# Altium PCB hvSdbPCB.PcbDoc
Units mm, origin at the board's own origin, x right, y up, seen from the top; angles counter-clockwise.
Board outline 75 x 64.7 mm, 2 copper layers (Top Layer, Bottom Layer); 34 components, 29 nets, 103 pads, 16 vias.
Unrouted connection lines stored in the file: 1.
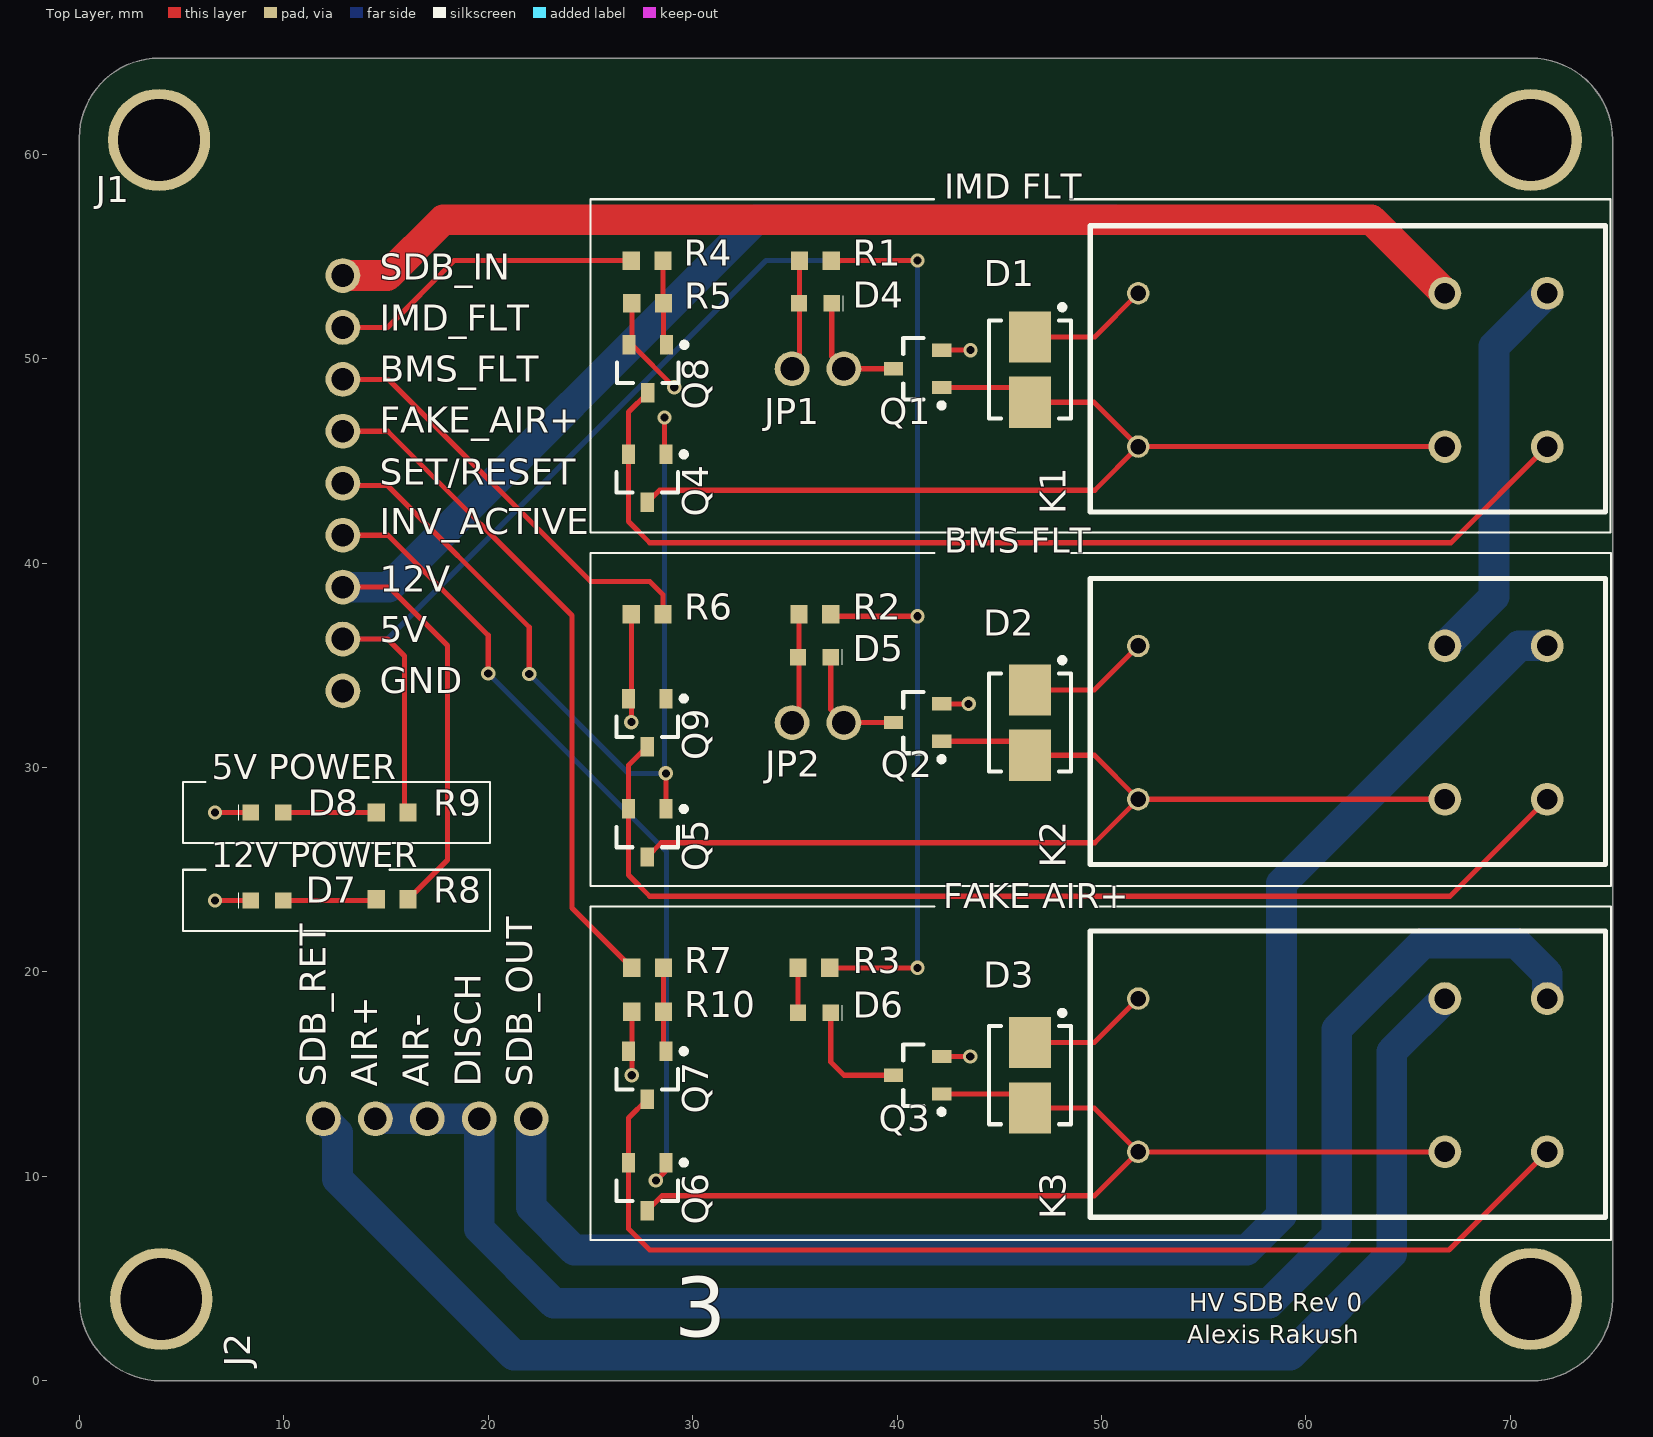
[diagram p0: Top Layer view]
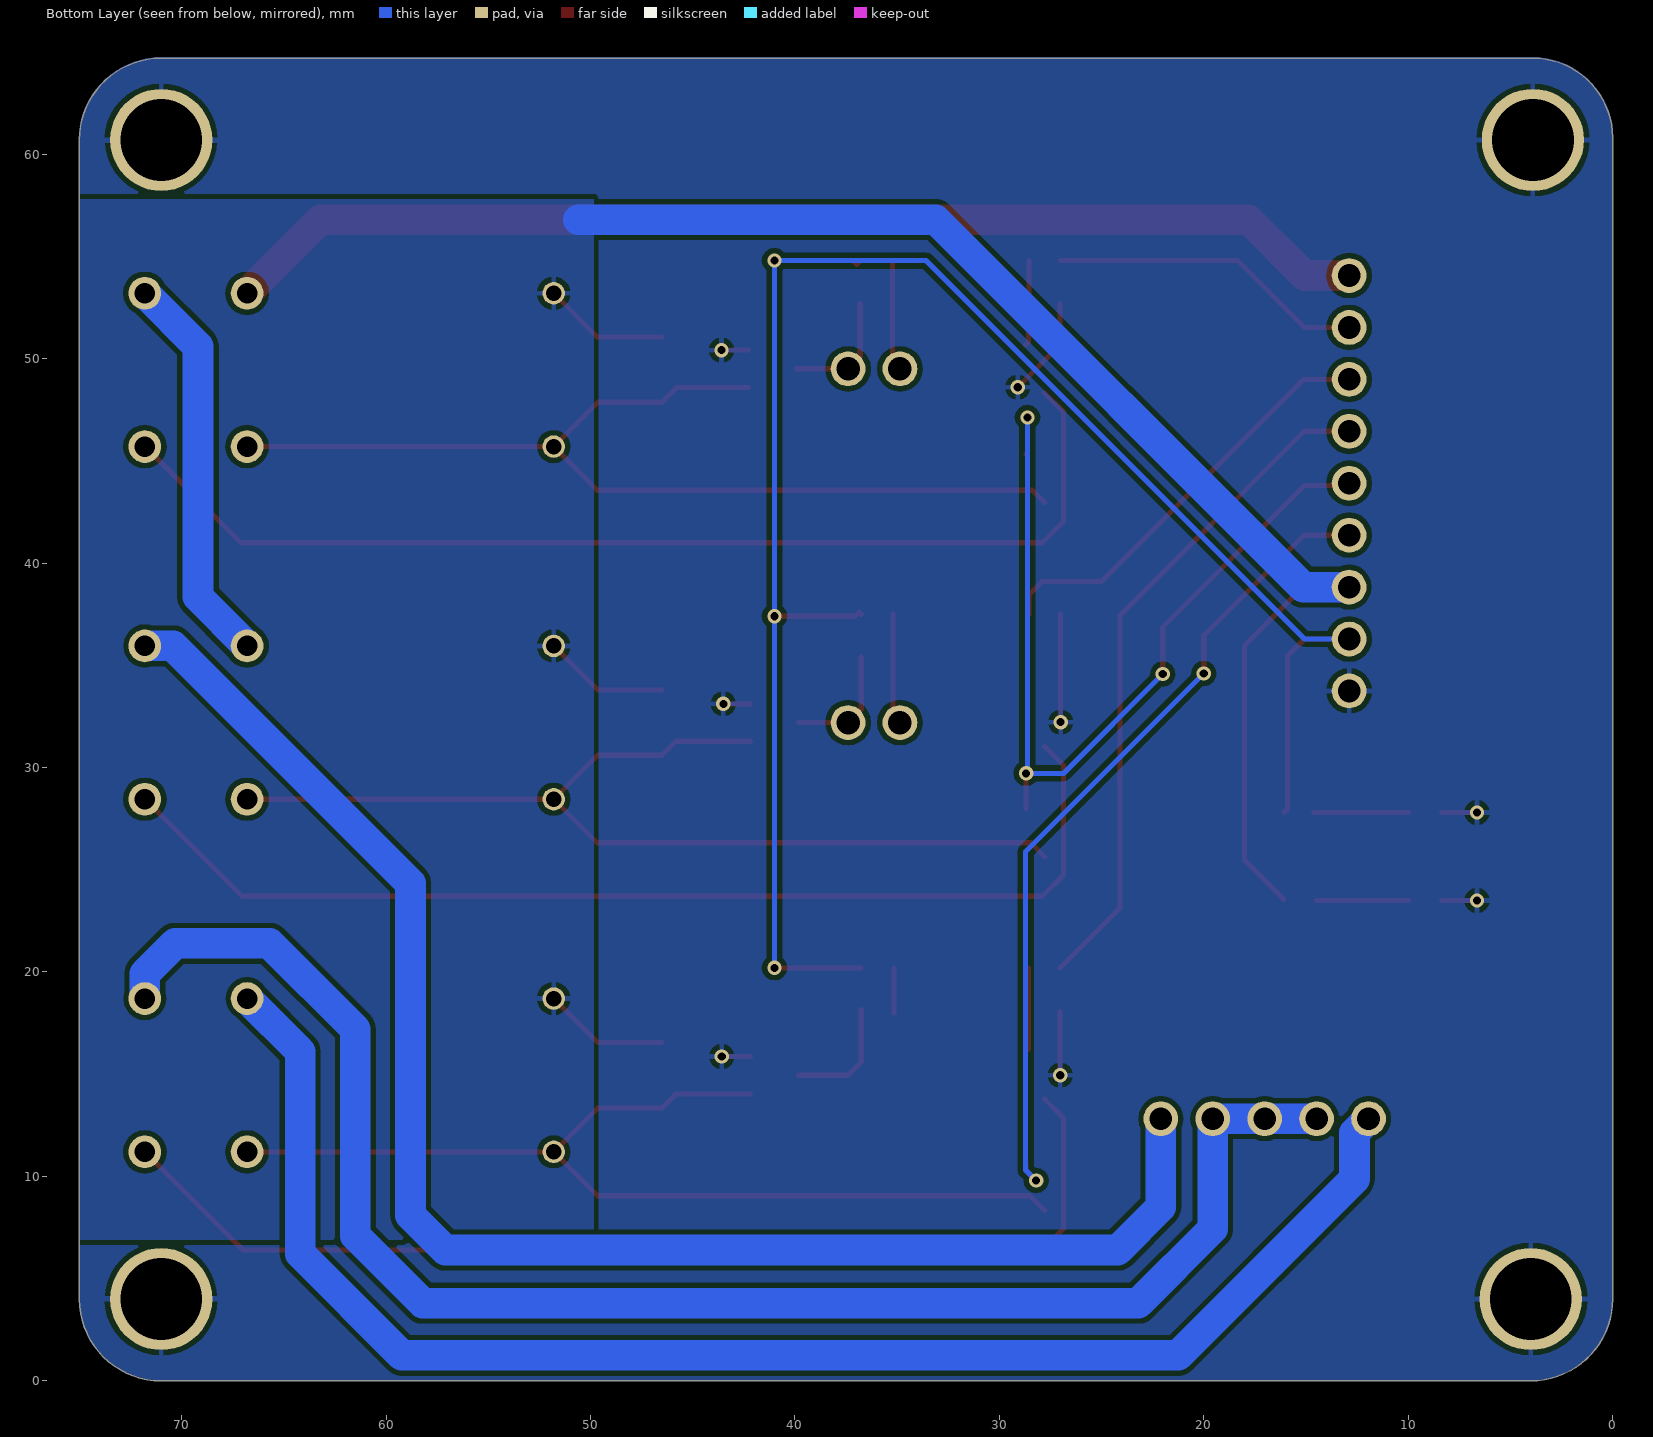
[diagram p1: Bottom Layer view, seen from below]

## Layer stack, top to bottom
Top Solder: solder mask 0.0102, Solder Resist, Dk 3.5
Top Layer: signal copper 0.0356
Dielectric 1: dielectric 0.32, FR-4, Dk 4.8
Bottom Layer: signal copper 0.0356
Bottom Solder: solder mask 0.0102, Solder Resist, Dk 3.5

## Board outline
71,0 ccw(c71,4) 75,4 75,60.7 ccw(c71,60.7) 71,64.7 3.9,64.7 ccw(c3.9,60.8) 0,60.8 0,4 ccw(c4,4) 4,0
cut-out: 12.573,119.888
cut-out: 165.608,30.607

## Design rules (kind name [scope] priority, off if disabled: settings)
Clearance [All] p1: gap=0.254 ignorepadtopadclearanceinfootprint=TRUE except(0: Arc-Hole Track-Hole SMDPad-Hole THPad-Hole Via-Hole Fill-Hole Poly-Hole Region-Hole Text-Hole)
PolygonConnect [All] p1: connectstyle=Relief reliefconductorwidth=0.254 reliefentries=4 polygonreliefangle="90 Angle" airgapwidth=0.254
RoutingVias [All] p1: holewidth=0.711 width=1.27 viastyle="Through Hole" minholewidth=0.711 minwidth=1.27 maxholewidth=0.711 maxwidth=1.27
SolderMaskExpansion [All] p1: expansion=0.102
Width [All] p1: maxlimit=5 minlimit=0.254 preferedwidth=0.254 minimp=50.000000 maximp=50.000000 favimp=50.000000
30 further rules are at their usual default settings.

## Components (designator, comment, footprint, x,y, rotation, side; value= is the part's Value field where it differs from the comment)
D1 "100V" DO-214AA 46.5,49.467 r270 top
D2 "100V" DO-214AA 46.5,32.2 r270 top
D3 "100V" DO-214AA 46.5,14.95 r270 top
D4 "Red" LED-0603 37.2,53.504 r180 top
D5 "Red" LED-0603 37.15,36.2 r180 top
D6 "Red" LED-0603 37.15,18.8 r180 top
D7 "Green" LED-0603 7.975,22.7 r0 top
D8 "Green" LED-0603 7.975,27 r0 top
J1 "23-0705530113-ND" 9PIN 12.889,54.067 r270 top
J2 "WM4903-ND" 5PIN 11.94,12.823 r0 top
JP1 "732-5315-ND" 2PIN-JP 37.4,49.504 r180 top
JP2 "732-5315-ND" 2PIN-JP 37.4,32.2 r180 top
K1 "5-1419124-6" "RELAY DPST SDC" 49.848,43 r0 top
K2 "5-1419124-6" "RELAY DPST SDC" 49.848,25.75 r0 top
K3 "5-1419124-6" "RELAY DPST SDC" 49.848,8.5 r0 top
Q1 "DMN6140L-13DICT-ND" SOT-23-3 41,49.504 r180 top
Q2 "DMN6140L-13DICT-ND" SOT-23-3 41,32.2 r180 top
Q3 "DMN6140L-13DICT-ND" SOT-23-3 41,14.95 r180 top
Q4 "DMN6140L-13DICT-ND" SOT-23-3 27.775,44.146 r270 top
Q5 "DMN6140L-13DICT-ND" SOT-23-3 27.775,26.8 r270 top
Q6 "DMN6140L-13DICT-ND" SOT-23-3 27.775,9.5 r270 top
Q7 "DMN6140L-13DICT-ND" SOT-23-3 27.775,14.95 r270 top
Q8 "DMN6140L-13DICT-ND" SOT-23-3 27.8,49.504 r270 top
Q9 "DMN6140L-13DICT-ND" SOT-23-3 27.775,32.2 r270 top
R1 "240R" RES-0603 36,54.8 r0 top
R2 "240R" RES-0603 35.975,37.496 r0 top
R3 "240R" RES-0603 35.925,20.2 r0 top
R4 "1K" RES-0603 27.775,54.8 r180 top
R5 "1K" RES-0603 27.8,52.704 r0 top
R6 "10K" RES-0603 27.775,37.496 r0 top
R7 "1K" RES-0603 27.8,20.2 r180 top
R8 "665R" RES-0603 15.3,23.55 r0 top
R9 "180R" RES-0603 15.3,27.8 r0 top
R10 "1K" RES-0603 27.8,18.05 r0 top

## Footprints (in the part's own frame and the unit in brackets; to place one, negate y for a bottom-side part, rotate by r counter-clockwise, add the part's x,y. Pads: shape width x height; smd on the part's side, far side on the other; paste and mask are expansions set on the pad)
2PIN-JP [mm]
  round 1.7 hole 1.15: 1(0,0) 2(2.54,0)
  body extent -1.24,-1.27 3.84,1.27, height 8.57
5PIN [mm]
  round 1.7 hole 1.11: 1(0,0) 2(2.54,0) 3(5.08,0) 4(7.62,0) 5(10.16,0)
  body extent -2.52,-12.82 12.72,0.77, height 7.06
9PIN [mm]
  round 1.7 hole 1.11: 1(0,0) 2(2.54,0) 3(5.08,0) 4(7.62,0) 5(10.16,0) 6(12.7,0) 7(15.24,0) 8(17.78,0) 9(20.32,0)
  body extent -2.5,-12.89 22.9,0.7, height 7.06
DO-214AA [mm] "Molded Diode, 2-Leads, Body 4.40x3.62mm, IPC Medium Density"
  rect 2.5x2.05 smd: 1(-1.6,0) 2(1.6,0)
  silkscreen extent -3.17,-2 2.4,2, body extent -2.6,-1.97 2.6,1.97, height 2.41
LED-0603 [mm]
  rect 0.8x0.8 smd: 1(2,0.8) 2(0.4,0.8)
  silkscreen extent -0.18,0.43 -0.18,1.17, body extent 0.4,0.4 2,1.2, height 0.7
"RELAY DPST SDC" [mm]
  round 1.1 hole 0.762: 1(1.95,2.7) 6(1.95,10.2)
  round 1.6 hole 1: 2(16.95,2.7) 3(21.95,2.7) 4(21.95,10.2) 5(16.95,10.2)
  silkscreen extent -0.4,-0.5 24.8,13.5, body extent 0,0 24.4,12.9, height 24.51
RES-0603 [mm] "Chip Resistor, 2-Leads, Body 1.60x0.80mm, IPC Medium Density"
  rect 0.85x0.9 smd: 1(-0.775,0) 2(0.775,0)
  body extent -0.85,-0.45 0.85,0.45, height 0.55
SOT-23-3 [mm] "SOT23, 3-Leads, Body 2.90x2.40mm, Pitch 0.92mm, IPC Medium Density"
  rect 0.95x0.65 smd: 1(-1.175,0.915) 2(1.175,0) 3(-1.175,-0.915)
  silkscreen extent -1.3,-1.5 0.7,1.91, body extent -1.25,-1.5 1.25,1.5, height 1.1

## Part data
D1 D2 D3: library part Diode-100V-3A, "DIODE GEN PURP 100V 3A DO214AA", Average Rectified Current=3A, Forward Voltage=1.15V, Manufacturer=MCC, Manufacturer Part Number=S3BB-TP, Max Surge Current=100A, Package Quantity=1, Peak Reverse Current=10uA, Supplier Part Number 1=S3BB-TPMSDKR-ND, ComponentLink1Description=http://www.mccsemi.com/up_pdf/S3AB-S3MB(SMB).PDF?src-supplier=Digi-Key, ComponentLink1URL=http://www.mccsemi.com/up_pdf/S3AB-S3MB(SMB).PDF?src-supplier=Digi-Key, ComponentLink2Description=https://www.verical.com/server-webapp/html/getDatasheet?partID=686538&src-supplier=Verical, ComponentLink2URL=https://www.verical.com/server-webapp/html/getDatasheet?partID=686538&src-supplier=Verical, ComponentLink3Description=http://www.mccsemi.com/up_pdf/S3AB-S3MB(SMB).PDF?src-supplier=Future+Electronics, ComponentLink3URL=http://www.mccsemi.com/up_pdf/S3AB-S3MB(SMB).PDF?src-supplier=Future+Electronics, Element Configuration=Single, Lead Free="Lead Free", Max Repetitive Reverse Voltage (Vrrm)=100V, Max Reverse Voltage (DC)=100V, Mount="Surface Mount", Number of Pins=2, Packaging="Tape and Reel", Peak Non-Repetitive Surge Current=100A, Pricing 1="1=0.46, 10=0.376, 25=0.344, 100=0.216, 250=0.2136, 500=0.2, 1000=0.136 (USD)", Radiation Hardening=No, Reverse Voltage=100V, Stock 1=9444, Supplier 1=Digi-Key
D4 D5 D6: library part LED-Red, "LED RED CLEAR 0603 SMD", Case/Package=0603, Case Code (Metric)=1608, Forward Current=30mA, Forward Voltage=2V, Manufacturer="Wurth Electronics", Manufacturer Part Number=150060RS75000, Max Operating Temperature=85°C, Min Operating Temperature=-40°C, Package Quantity=1, Supplier Part Number 1=732-4978-6-ND, Test Current=20mA, Case Code (Imperial)=0603, Color=Red, ComponentLink1Description=https://katalog.we-online.de/led/datasheet/150060RS75000.pdf?src-supplier=Digi-Key, ComponentLink1URL=https://katalog.we-online.de/led/datasheet/150060RS75000.pdf?src-supplier=Digi-Key, ComponentLink2Description=http://www.produktinfo.conrad.com/datenblaetter/750000-774999/759428-da-01-en-CHIPLED_0603_W_KL_ROT_150060RS75000.pdf?src-supplier=Conrad, ComponentLink2URL=http://www.produktinfo.conrad.com/datenblaetter/750000-774999/759428-da-01-en-CHIPLED_0603_W_KL_ROT_150060RS75000.pdf?src-supplier=Conrad, Dominant Wavelength=625nm, Height=0.7mm, Length=1.6mm, Lens Style=Clear,Rectangular, Luminous Intensity=250mcd, Mount="Surface Mount", Packaging="Cut Tape", Pricing 1="1=0.14, 50=0.133, 100=0.114, 500=0.099 (USD)", REACH SVHC=Unknown, Stock 1=18518, Supplier 1=Digi-Key, Viewing Angle=140°, Wavelength=625nm, Width=0.8mm
D7 D8: library part LED-Green, "LED GREEN CLEAR 0603 SMD", Case/Package=0603, Case Code (Metric)=1608, Forward Current=30mA, Forward Voltage=2V, Manufacturer="Wurth Electronics", Manufacturer Part Number=150060VS75000, Max Operating Temperature=85°C, Min Operating Temperature=-40°C, Package Quantity=1, Supplier Part Number 1=732-4980-1-ND, Test Current=20mA, Case Code (Imperial)=0603, Color=Green, ComponentLink1Description=https://katalog.we-online.de/led/datasheet/150060VS75000.pdf?src-supplier=Digi-Key, ComponentLink1URL=https://katalog.we-online.de/led/datasheet/150060VS75000.pdf?src-supplier=Digi-Key, Dominant Wavelength=570nm, Height=0.7mm, Length=1.6mm, Lens Style=Clear,Rectangular, Luminous Intensity=40mcd, Mount="Surface Mount", Number of Pins=2, Packaging="Tape and Reel", Pricing 1="1=0.14, 50=0.133, 100=0.114, 500=0.099 (USD)", REACH SVHC=Unknown, Stock 1=118118, Supplier 1=Digi-Key, Viewing Angle=140°, Wavelength=570nm, Width=0.8mm
J1: library part 9PIN, "CONN HEADER R/A 9POS 2.54MM", Color=Black, Contact Resistance=30mR, Current Rating=3A, Flammability Rating="UL94 V-0", Insulation Resistance=1GR, Manufacturer=Molex, Manufacturer Part Number=70553-0112, Max Operating Temperature=105°C, Min Operating Temperature=-40°C, Package Quantity=1, Voltage Rating=250V, ComponentLink1Description=https://www.molex.com/pdm_docs/ps/PS-70400.pdf?src-supplier=Digi-Key, ComponentLink1URL=https://www.molex.com/pdm_docs/ps/PS-70400.pdf?src-supplier=Digi-Key, ComponentLink2Description=http://www.mouser.com/ds/2/276/0705530112_PCB_HEADERS-172840.pdf?src-supplier=Mouser, ComponentLink2URL=http://www.mouser.com/ds/2/276/0705530112_PCB_HEADERS-172840.pdf?src-supplier=Mouser, Connector Type="Male Pin", Contact Material=Bronze, Contact Mating Length=0.24inch, Contact Plating=Gold, ELV=Compliant, Glow Wire Compliant=Non-compliant, Housing Material=Thermoplastic, Material=Brass, Mount="Through Hole", Number of Circuits=8, Number of Contacts=8, Number of Positions=8, Number of Rows=1, Orientation="Right Angle", Packaging=Rail/Tube, Pitch=2.54mm, Supplier 1=Digi-Key, Supplier Part Number 1=23-0705530113-ND, Termination=Solder, Voltage Rating (DC)=250V
J2: library part 5PIN, "CONN HEADER R/A 5POS 2.54MM", Color=Black, Contact Resistance=30mR, Manufacturer=Molex, Manufacturer Part Number=0705530004, Max Operating Temperature=105°C, Min Operating Temperature=-40°C, ComponentLink1Description=https://www.molex.com/pdm_docs/ps/PS-70400.pdf?src-supplier=Digi-Key, ComponentLink1URL=https://www.molex.com/pdm_docs/ps/PS-70400.pdf?src-supplier=Digi-Key, ComponentLink2Description=http://components.arrow.com/part/dataview/2934370S3514244N3303?src-supplier=Arrow, ComponentLink2URL=http://components.arrow.com/part/dataview/2934370S3514244N3303?src-supplier=Arrow, Connector Type="Male Pin", Contact Material=Bronze, Contact Mating Length=0.24inch, Contact Plating=Gold, Depth=13.59mm, Fastening Type=Latch, Housing Color=Black, Housing Material=Polyester, Length=15.25mm, Mount="Through Hole", Number of Contacts=5, Number of Positions=5, Number of Rows=1, Orientation="Right Angle", Packaging=Rail/Tube, Pitch=2.54mm, Pricing 1="1=1.39, 10=1.22, 100=1.0527, 500=0.86134, 1000=0.76563, 5000=0.66993, 10000=0.63643 (USD)", Stock 1=2739, Supplier 1=Digi-Key, Supplier Part Number 1=WM4903-ND, Termination=Solder
JP1 JP2: library part 2PIN-TEST, "CONN HEADER VERT 2POS 2.54MM"
K1 K2 K3: "General Purpose Relay, Osa Series, Power, Non Latching, Dpst-No, 12 Vdc, 3 A Rohs Compliant: Yes", Coil Current=45mA, Coil Power=600mW, Coil Resistance=270R, Coil Voltage (DC)=12V, Contact Current Rating=3A, Contact Voltage Rating (AC)=240V, Manufacturer="TE Connectivity", Max Operating Temperature=60°C, Min Operating Temperature=-30°C, Package Quantity=1000, Supplier Part Number 1=OSA-SS-212DM3,000-ND, Category=Relays, Coil Type=Non-Latching, ComponentLink1Description=http://www.farnell.com/datasheets/1652820.pdf?src-supplier=Farnell, ComponentLink1URL=http://www.farnell.com/datasheets/1652820.pdf?src-supplier=Farnell, ComponentLink2Description=http://www.farnell.com/cad/1652820.pdf?src-supplier=Element14, ComponentLink2URL=http://www.farnell.com/cad/1652820.pdf?src-supplier=Element14, ComponentLink3Description=http://www.te.com/commerce/DocumentDelivery/DDEController?Action=srchrtrv&DocNm=5-1419124-6&DocType=Customer+Drawing&DocLang=English&src-supplier=Digi-Key, ComponentLink3URL=http://www.te.com/commerce/DocumentDelivery/DDEController?Action=srchrtrv&DocNm=5-1419124-6&DocType=Customer+Drawing&DocLang=English&src-supplier=Digi-Key, Contact Material=Silver, ELV=Compliant, Height=0.976inch, Length=24.4mm, Manufacturer Part Number=5-1419124-6, Mount="Through Hole", Operate Time=20ms, Packaging=Box, Pricing 1="1=2.54, 10=2.385, 25=2.1204, 50=2.0142, 100=1.9083, 250=1.69624, 500=1.59022, 1000=1.48421, 5000=1.4312 (USD)", REACH SVHC=Unknown, Relay Type="General Purpose", Release Time=10ms, Stock 1=2593, Supplier 1=Digi-Key, Termination=PCB, Throw Configuration=DPST, Weight=13g, Width=12.9mm
Q1 Q2 Q3 Q4 Q5 Q6 Q7 Q8 Q9: library part N-FET-60V-1.6A, "MOSFET N-CH 60V 1.6A SOT23", Case/Package=TO-236-3, Continuous Drain Current (ID)=1.6A, Drain to Source Voltage (Vdss)=60V, Input Capacitance=315pF, Manufacturer=Diodes, Manufacturer Part Number=DMN6140L-13, Max Operating Temperature=150°C, Max Power Dissipation=700mW, Min Operating Temperature=-55°C, Package Quantity=10000, Supplier Part Number 1=DMN6140L-13DIDKR-ND, ComponentLink1Description=https://www.diodes.com/assets/Datasheets/DMN6140L.pdf?src-supplier=Digi-Key, ComponentLink1URL=https://www.diodes.com/assets/Datasheets/DMN6140L.pdf?src-supplier=Digi-Key, Mount="Surface Mount", Packaging="Cut Tape", Pricing 1="1=0.34, 10=0.256, 25=0.224, 100=0.1217, 250=0.12104, 500=0.09926, 1000=0.07365, 2500=0.06468, 5000=0.05924 (USD)", Rds On Max=140mR, Stock 1=274948, Supplier 1=Digi-Key
R1 R2 R3: library part 0603-240R, "RES 240 OHM 1% 1/10W 0603", Case/Package=0603, Case Code (Metric)=1608, Manufacturer="Stackpole Electronics", Manufacturer Part Number=RMCF0603FT240R, Max Operating Temperature=155°C, Max Power Dissipation=100mW, Min Operating Temperature=-55°C, Package Quantity=5000, Supplier Part Number 1=738-RMCF0603FT240RDKR-ND, Temperature Coefficient=100ppm/°C, Tolerance=1%, Case Code (Imperial)=0603, ComponentLink1Description=https://www.seielect.com/catalog/SEI-RMCF_RMCP.pdf?src-supplier=Avnet, ComponentLink1URL=https://www.seielect.com/catalog/SEI-RMCF_RMCP.pdf?src-supplier=Avnet, ComponentLink2Description=http://components.arrow.com/part/dataview/40960290S7280662N1174?src-supplier=Arrow, ComponentLink2URL=http://components.arrow.com/part/dataview/40960290S7280662N1174?src-supplier=Arrow, ComponentLink3Description=https://www.seielect.com/catalog/SEI-Packaging.pdf?src-supplier=Digi-Key, ComponentLink3URL=https://www.seielect.com/catalog/SEI-Packaging.pdf?src-supplier=Digi-Key, ComponentLink4Description=https://www.seielect.com/Catalog/SEI-RMCF_RMCP.pdf?src-supplier=Digi-Key, ComponentLink4URL=https://www.seielect.com/Catalog/SEI-RMCF_RMCP.pdf?src-supplier=Digi-Key, ComponentLink5Description=http://www.seielect.com/Catalog/SEI-RMC.pdf?src-supplier=Future+Electronics, ComponentLink5URL=http://www.seielect.com/Catalog/SEI-RMC.pdf?src-supplier=Future+Electronics, Composition="Thick Film", Contact Plating=Tin,Matte, Features="Automotive AEC-Q200", Height=0.022inch, Lead Free="Lead Free", Length=0.061inch, Mount="Surface Mount", Number of Terminations=2, Packaging="Tape and Reel", Power Rating=100mW, Pricing 1="1=0.1, 10=0.016, 100=0.0065, 1000=0.00292, 2500=0.00253 (USD)", Radiation Hardening=No, Resistance=240R, Stock 1=23096, Supplier 1=Digi-Key, Width=0.031inch
R4 R5 R7 R10: library part 0603-1KR, "RES SMD 1K OHM 1% 1/10W 0603", Case/Package=0603, Case Code (Metric)=1608, Manufacturer="Vishay Dale", Manufacturer Part Number=CRCW06031K00FKEA, Max Operating Temperature=155°C, Max Power Dissipation=100mW, Min Operating Temperature=-55°C, Package Quantity=10, Resistance=1kR, Supplier Part Number 1=541-1.00KHCT-ND, Temperature Coefficient=100ppm/°C, Tolerance=1%, Voltage Rating=75V, Case Code (Imperial)=0603, ComponentLink1Description=http://www.vishay.com/docs/20035/dcrcwe3.pdf?src-supplier=Digi-Key, ComponentLink1URL=http://www.vishay.com/docs/20035/dcrcwe3.pdf?src-supplier=Digi-Key, ComponentLink2Description=http://uk.rs-online.com/webdocs/0d98/0900766b80d98afc.pdf?src-supplier=RSComponents, ComponentLink2URL=http://uk.rs-online.com/webdocs/0d98/0900766b80d98afc.pdf?src-supplier=RSComponents, ComponentLink3Description=http://www.vishay.com/docs/20035/dcrcwe3.pdf?src-supplier=Avnet, ComponentLink3URL=http://www.vishay.com/docs/20035/dcrcwe3.pdf?src-supplier=Avnet, ComponentLink4Description=http://www.vishay.com/docs/20035/dcrcwe3.pdf?src-supplier=Avnet+Asia, ComponentLink4URL=http://www.vishay.com/docs/20035/dcrcwe3.pdf?src-supplier=Avnet+Asia, ComponentLink5Description=http://www.farnell.com/datasheets/2310790.pdf?src-supplier=Element14, ComponentLink5URL=http://www.farnell.com/datasheets/2310790.pdf?src-supplier=Element14, ComponentLink6Description=https://www.distrelec.biz/Web/Downloads/a_/en/flD-CRCW-e3_data_en.pdf?mime=application%2Fpdf&src-supplier=Distrelec, ComponentLink6URL=https://www.distrelec.biz/Web/Downloads/a_/en/flD-CRCW-e3_data_en.pdf?mime=application%2Fpdf&src-supplier=Distrelec, ComponentLink7Description=http://www.vishay.com/docs/20035/dcrcwe3.pdf?src-supplier=Future+Electronics, ComponentLink7URL=http://www.vishay.com/docs/20035/dcrcwe3.pdf?src-supplier=Future+Electronics, ComponentLink8Description=http://www.vishay.com/docs/20035/dcrcwe3.pdf?src-supplier=Avnet+Europe, ComponentLink8URL=http://www.vishay.com/docs/20035/dcrcwe3.pdf?src-supplier=Avnet+Europe, Composition="Thick Film", Contact Plating=Tin, Depth=0.85mm, Features="Automotive AEC-Q200", Height=0.45mm, Lead Free="Lead Free", Length=1.55mm, Military Standard=Not, Mount="Surface Mount", Number of Pins=2, Number of Terminations=2, Packaging="Tape and Reel", Power Rating=100mW, Pricing 1="1=0.1, 10=0.034, 100=0.0139, 1000=0.00623, 2500=0.0054 (USD)", Radiation Hardening=No, REACH SVHC=Unknown, Stock 1=671453, Supplier 1=Digi-Key, Termination=SMD/SMT, Voltage Rating (DC)=75V, Weight=7.1E-05oz, Width=0.033inch
R6: library part 0603-10KR, "RES SMD 10K OHM 5% 1/10W 0603", Case/Package=0603, Case Code (Metric)=1608, Manufacturer=Yageo, Manufacturer Part Number=RC0603JR-0710KL, Max Operating Temperature=155°C, Max Power Dissipation=100mW, Min Operating Temperature=-55°C, Resistance=10kR, Supplier Part Number 1=311-10KGRDKR-ND, Temperature Coefficient=100ppm/°C, Tolerance=5%, Voltage Rating=50V, Case Code (Imperial)=0603, ComponentLink1Description=http://www.yageo.com/documents/recent/PYu-RC_Group_51_RoHS_L_10.pdf?src-supplier=Digi-Key, ComponentLink1URL=http://www.yageo.com/documents/recent/PYu-RC_Group_51_RoHS_L_10.pdf?src-supplier=Digi-Key, Composition="Thick Film", Contact Plating=Tin,Matte, Depth=0.8mm, Features="Moisture Resistant", Height - Seated (Max)=0.022inch, Lead Free="Lead Free", Length=0.063inch, Military Standard=Not, Number of Pins=2, Number of Terminations=2, Packaging="Tape and Reel", Power Rating=100mW, Pricing 1="1=0.1, 10=0.019, 100=0.0077, 1000=0.00347, 2500=0.00301 (USD)", Radiation Hardening=No, REACH SVHC=Unknown, Stock 1=3006558, Supplier 1=Digi-Key, Termination=SMD/SMT, Voltage Rating (DC)=50V, Width=0.031inch
R8: library part 0603-665R, "RES SMD 665 OHM 1% 1/10W 0603", Case/Package=0603, Case Code (Metric)=1608, Manufacturer=Yageo, Manufacturer Part Number=RC0603FR-07665RL, Max Operating Temperature=155°C, Max Power Dissipation=100mW, Min Operating Temperature=-55°C, Package Quantity=1, Supplier Part Number 1=311-665HRDKR-ND, Temperature Coefficient=100ppm/°C, Tolerance=1%, Voltage Rating=75V, Voltage Rating (DC)=50V, Case Code (Imperial)=0603, ComponentLink1Description=http://www.yageo.com/documents/recent/PYu-RC_Group_51_RoHS_L_9.pdf?src-supplier=Digi-Key, ComponentLink1URL=http://www.yageo.com/documents/recent/PYu-RC_Group_51_RoHS_L_9.pdf?src-supplier=Digi-Key, ComponentLink2Description=http://www.yageo.com/documents/recent/PYu-RC0603_51_RoHS_L_4.pdf?src-supplier=Avnet, ComponentLink2URL=http://www.yageo.com/documents/recent/PYu-RC0603_51_RoHS_L_4.pdf?src-supplier=Avnet, ComponentLink3Description=http://www.yageo.com/documents/recent/PYu-RC_Group_51_RoHS_L_10.pdf?src-supplier=Digi-Key, ComponentLink3URL=http://www.yageo.com/documents/recent/PYu-RC_Group_51_RoHS_L_10.pdf?src-supplier=Digi-Key, ComponentLink4Description=http://www.yageo.com/documents/recent/PYu-RC0603_51_RoHS_L_4.pdf?src-supplier=Avnet+Europe, ComponentLink4URL=http://www.yageo.com/documents/recent/PYu-RC0603_51_RoHS_L_4.pdf?src-supplier=Avnet+Europe, Composition="Thick Film", Contact Plating=Tin,Matte, Depth=0.8mm, Features="Moisture Resistant", Height=0.022inch, Lead Free="Lead Free", Length=1.6mm, Military Standard=Not, Number of Terminations=2, Packaging="Tape and Reel", Power Rating=100mW, Pricing 1="1=0.1, 10=0.023, 100=0.0094, 1000=0.00421, 2500=0.00366 (USD)", Resistance=665R, Stock 1=143871, Supplier 1=Digi-Key, Termination=SMD/SMT, Weight=7.1E-05oz, Width=0.8mm
R9: library part 0603-180R, "RES SMD 180 OHM 1% 1/10W 0603", Case/Package=0603, Case Code (Metric)=1608, Manufacturer="TE Connectivity", Manufacturer Part Number=CRGCQ0603F180R, Max Operating Temperature=155°C, Max Power Dissipation=100mW, Min Operating Temperature=-55°C, Supplier Part Number 1=A129679DKR-ND, Temperature Coefficient=100ppm/°C, Tolerance=1%, Case Code (Imperial)=0603, ComponentLink1Description=https://www.te.com/commerce/DocumentDelivery/DDEController?Action=srchrtrv&DocNm=1773204-3&DocType=DS&DocLang=English&src-supplier=Digi-Key, ComponentLink1URL=https://www.te.com/commerce/DocumentDelivery/DDEController?Action=srchrtrv&DocNm=1773204-3&DocType=DS&DocLang=English&src-supplier=Digi-Key, ComponentLink2Description=https://www.te.com/commerce/DocumentDelivery/DDEController?Action=srchrtrv&amp;DocNm=1773204-3&amp;DocType=DS&amp;DocLang=English&src-supplier=Digi-Key, ComponentLink2URL=https://www.te.com/commerce/DocumentDelivery/DDEController?Action=srchrtrv&amp;DocNm=1773204-3&amp;DocType=DS&amp;DocLang=English&src-supplier=Digi-Key, ComponentLink3Description=http://www.te.com/commerce/DocumentDelivery/DDEController?Action=srchrtrv&DocNm=1773204-3&DocType=DS&DocLang=English&src-supplier=Digi-Key, ComponentLink3URL=http://www.te.com/commerce/DocumentDelivery/DDEController?Action=srchrtrv&DocNm=1773204-3&DocType=DS&DocLang=English&src-supplier=Digi-Key, ComponentLink4Description=http://www.farnell.com/datasheets/2609223.pdf?src-supplier=Farnell, ComponentLink4URL=http://www.farnell.com/datasheets/2609223.pdf?src-supplier=Farnell, Composition="Thick Film", Features="Moisture Resistant,Automotive AEC-Q200", Number of Terminations=2, Packaging="Tape and Reel", Pricing 1="1=0.1, 10=0.03, 100=0.012, 1000=0.00541, 2500=0.00469 (USD)", Resistance=180R, Stock 1=17329, Supplier 1=Digi-Key

## Free pads (board coordinates)
  round 5 hole 4 unplated: 0(3.9,60.7) 0(4,4) 0(71,4) 0(71,60.7)

## Via types
v1: diameter 0.7, hole 0.4, Top Layer to Bottom Layer, 16 vias

## Nets (pads, with @x,y where several pads share a name; then routed paths per layer and width w, separated by ;. In a path a pad name is that pad's centre, name@x,y a point inside that pad or via, vN(x,y) a via of type N, cw(c..) or ccw(c..) an arc to the next point about the centre after c; other vN are vias at no path point)
5V: J1.8 R1.2 R2.2 R3.2 R9.2 | length 94.5
  Top Layer w0.254: J1.8 15.067,36.287 15.9,35.454 15.9,27.975 R9.2 ; R2.2 36.854,37.6 37.054,37.4 v1(41,37.4) ; R3.2@36.775,20.2 v1(41,20.2) ; R1.2 36.975,54.6 37.175,54.8 v1(41,54.8)
  Bottom Layer w0.254: J1.8 15.067,36.287 33.58,54.8 v1(41,54.8) v1(41,37.4) v1(41,20.2)
12V: D1.1 D2.1 D3.1 J1.7 K1.6 K2.6 K3.6 R8.2 | length 83.2
  Top Layer w0.254: J1.7 15.14,38.827 18,35.967 18,25.475 R8.2 ; D3.1 49.648,16.55 K3.6 ; D2.1 49.648,33.8 K2.6 ; D1.1 49.665,51.067 K1.6
  Bottom Layer w1.5: J1.7 15.14,38.827 33.113,56.8 50.6,56.8
AIRs: J2.2 J2.3 J2.4 K3.4 | length 79.2
  Bottom Layer w1.5: J2.2 J2.3 J2.4 19.56,7.44 23.2,3.8 58.2,3.8 61.5,7.1 61.5,17.197 65.703,21.4 70.318,21.4 71.798,19.921 K3.4
BMS_FLT: J1.3 Q9.1 R6.2 | length 21
  Top Layer w0.254: J1.3 15.127,48.987 25.014,39.1 27.9,39.1 28.55,38.45 R6.2
FAKE_AIR+: J1.4 R7.2 | length 33.4
  Top Layer w0.254: J1.4 15.085,46.447 24.1,37.432 24.1,23.125 R7.2
GND: D7.2 D8.2 J1.9 pad.0 Q1.3 Q2.3 Q3.3 Q7.3 Q8.3 Q9.3 R5.1 R6.1 R10.1 | length 20.9
  Top Layer w0.254: v1(6.635,23.5) D7.2 ; v1(6.635,27.8) D8.2 ; v1(27,32.221) R6.1 ; v1(27.021,14.95) 27.025,14.954 R10.1 ; R5.1 27.025,50.679 v1(29.1,48.604) ; Q3.3 v1(43.575,15.865) ; Q2.3 v1(43.5,33.115) ; Q1.3@42.267,50.419 v1(43.592,50.419)
IMD_FLT: J1.2 R4.2 | length 15.5
  Top Layer w0.254: J1.2 15.067,51.527 18.34,54.8 R4.2
INV_ACTIVE: J1.6 Q6.1 | length 40.7
  Top Layer w0.254: J1.6 15.1,41.367 20,36.467 v1(20,34.6) ; v1(28.2,9.8) 28.69,10.29 Q6.1
  Bottom Layer w0.254: v1(20,34.6) 28.715,25.885 28.715,10.315 v1(28.2,9.8)
NetD1_2: D1.2 K1.1 K1.2 Q1.1 Q4.2 | length 50.9
  Top Layer w0.254: Q4.2 28.371,43.567 49.665,43.567 K1.1 ; Q1.1@42.267,48.589 45.778,48.589 D1.2 49.631,47.867 K1.1 ; K1.2 K1.1
NetD2_2: D2.2 K2.1 K2.2 Q2.1 Q5.2 | length 51
  Top Layer w0.254: Q5.2 28.467,26.317 49.665,26.317 K2.1 ; Q2.1 45.815,31.285 D2.2 49.648,30.6 K2.1 ; K2.2 K2.1
NetD3_2: D3.2 K3.1 K3.2 Q3.1 Q6.2 | length 51
  Top Layer w0.254: Q6.2 28.5,9.05 49.648,9.05 K3.1 ; Q3.1 45.815,14.035 D3.2 49.648,13.35 K3.1 ; K3.2 K3.1
NetD4_1: D4.1 JP1.2 R1.1 | length 5.4
  Top Layer w0.254: JP1.2 35.225,49.869 R1.1
NetD4_2: D4.2 JP1.1 Q1.2 | length 6
  Top Layer w0.254: D4.2 36.8,50.104 JP1.1 Q1.2@39.917,49.504
NetD5_1: D5.1 JP2.2 R2.1 | length 5.4
  Top Layer w0.254: JP2.2 35.2,32.54 R2.1
NetD5_2: D5.2 JP2.1 Q2.2 | length 5.9
  Top Layer w0.254: D5.2 36.75,32.85 JP2.1 Q2.2
NetD6_1: D6.1 R3.1 | length 2.2
  Top Layer w0.254: D6.1 R3.1
NetD6_2: D6.2 Q3.2 | length 5.9
  Top Layer w0.254: D6.2@36.75,18.15 36.75,15.6 37.4,14.95 Q3.2
NetD7_1: D7.1 R8.1 | length 4.5
  Top Layer w0.254: D7.1 R8.1@14.475,23.5
NetD8_1: D8.1 R9.1 | length 4.6
  Top Layer w0.254: D8.1 R9.1@14.625,27.8
NetK1_3: K1.3 Q4.3 Q8.2 | length 54
  Top Layer w0.254: Q8.2 26.86,47.389 Q4.3 26.86,42.04 27.9,41 67.098,41 K1.3
NetK1_4: K1.4 K2.5 | length 19.3
  Bottom Layer w1.5: K2.5 69.2,38.352 69.2,50.602 K1.4
NetK2_3: K2.3 Q5.3 Q9.2 | length 54
  Top Layer w0.254: Q9.2 26.86,30.11 Q5.3 26.86,24.74 27.9,23.7 67.048,23.7 K2.3
NetK3_3: K3.3 Q6.3 Q7.2 | length 54.1
  Top Layer w0.254: Q7.2 26.86,12.86 Q6.3 26.86,7.44 27.9,6.4 66.998,6.4 K3.3
NetQ7_1: Q7.1 R7.1 R10.2 | length 4.1
  Top Layer w0.254: R7.1 28.575,16.24 Q7.1
NetQ8_1: Q8.1 R4.1 R5.2 | length 4.2
  Top Layer w0.254: R4.1 28.55,52.729 R5.2 28.575,50.819 Q8.1
SDB_IN: J1.1 K1.5 | length 56.5
  Top Layer w1.5: J1.1 15.067,54.067 17.8,56.8 63.198,56.8 K1.5
SDB_OUT: J2.5 K2.4 | length 76.6
  Bottom Layer w1.5: J2.5 22.1,8.5 24.2,6.4 57.1,6.4 58.8,8.1 58.8,24.336 70.414,35.95 K2.4
SDB_RET: J2.1 K3.5 | length 74
  Bottom Layer w1.5: J2.1 12.626,12.137 12.626,9.874 21.253,1.247 59.223,1.247 64.2,6.225 64.2,16.102 K3.5
SET/RESET: J1.5 Q4.1 Q5.1 | length 44
  Top Layer w0.254: J1.5 12.996,43.8 15.067,43.8 22.005,36.862 v1(22.005,34.575) ; v1(28.625,47.126) 28.625,45.386 Q4.1 ; Q5.1 v1(28.69,29.715)
  Bottom Layer w0.254: v1(22.005,34.575) 26.865,29.715 v1(28.69,29.715) 28.625,29.78 v1(28.625,47.126)

## Polygon pours and split planes (outlines as drawn)
no net on Top Layer "Top Layer-No Net" (solid, pour order 2): 69.139,25.786
GND on Bottom Layer "Bottom Layer-GND" (solid, pour order 14): 71,0.039 ccw(c71,4.039) 75,4.039 75,60.739 ccw(c71,60.739) 71,64.739 3.9,64.739 ccw(c3.9,60.839) 0,60.839 0,4.039 ccw(c4,4.039) 4,0.039
12V on Bottom Layer "Bottom Layer-12V" (solid, pour order 12): 49.848,57.8 49.848,6.9 75,6.9 75,57.8
no net on Bottom Layer "Bottom Layer-No Net" (solid, pour order 10): 2,75

## Silkscreen, mask and mechanical layers (free items; w line width, h text height)
Top Overlay:
  lines w0.1: 6.175,25 5.575,25 5.075,25 5.075,22 20.075,22 20.075,25 15.575,25 15.175,25 ; 6.175,29.3 5.575,29.3 5.075,29.3 5.075,26.3 20.075,26.3 20.075,29.3 14.775,29.3 14.375,29.3 ; 41.8,57.8 25,57.8 25,41.5 74.9,41.5 74.9,57.8 48.47,57.8 ; 41.83,23.2 25,23.2 25,6.9 74.93,6.9 74.93,23.2 49.848,23.2 ; 41.83,40.5 25,40.5 25,24.2 74.93,24.2 74.93,40.5 48.5,40.5
  text "IMD FLT" at 42.3,57.4 h2.1
  text "SDB_IN" at 14.7,53.41 h2.2
  text "IMD_FLT" at 14.7,50.922 h2.2
  text "BMS_FLT" at 14.7,48.433 h2.2
  text "FAKE_AIR+" at 14.7,45.945 h2.2
  text "SET/RESET" at 14.7,43.401 h2.2
  text "INV_ACTIVE" at 14.7,40.968 h2.2
  text "BMS FLT" at 42.3,40.1 h2.1
  text "12V" at 14.7,38.163 h2.2
  text "5V" at 14.7,35.69 h2.2
  text "GND" at 14.7,33.2 h2.2
  text "5V POWER" at 6.475,29 h2.1
  text "12V POWER" at 6.463,24.7 h2.1
  text "FAKE AIR+" at 42.267,22.7 h2.1
  text "SDB_RET" at 12.5,14.388 h2.2 r90
  text "AIR+" at 15.01,14.386 h2.2 r90
  text "AIR-" at 17.535,14.386 h2.2 r90
  text "DISCH" at 20.075,14.388 h2.2 r90
  text "SDB_OUT" at 22.6,14.388 h2.2 r90
  text "HV SDB Rev 0" at 54.3,3.1 h1.5
  text "Alexis Rakush" at 54.2,1.539 h1.5
  text "3" at 29.1,1.2 h5
sillyBoard:
  the board outline again, w0.1